# Altium PCB MB.PcbDoc (part 2 of 3)
Units mil, origin at the board's own origin, x right, y up, seen from the top; angles counter-clockwise.
Board outline 5718.69 x 3947.04 mil, 2 copper layers (Top Layer, Bottom Layer); 146 components, 154 nets, 660 pads, 249 vias.
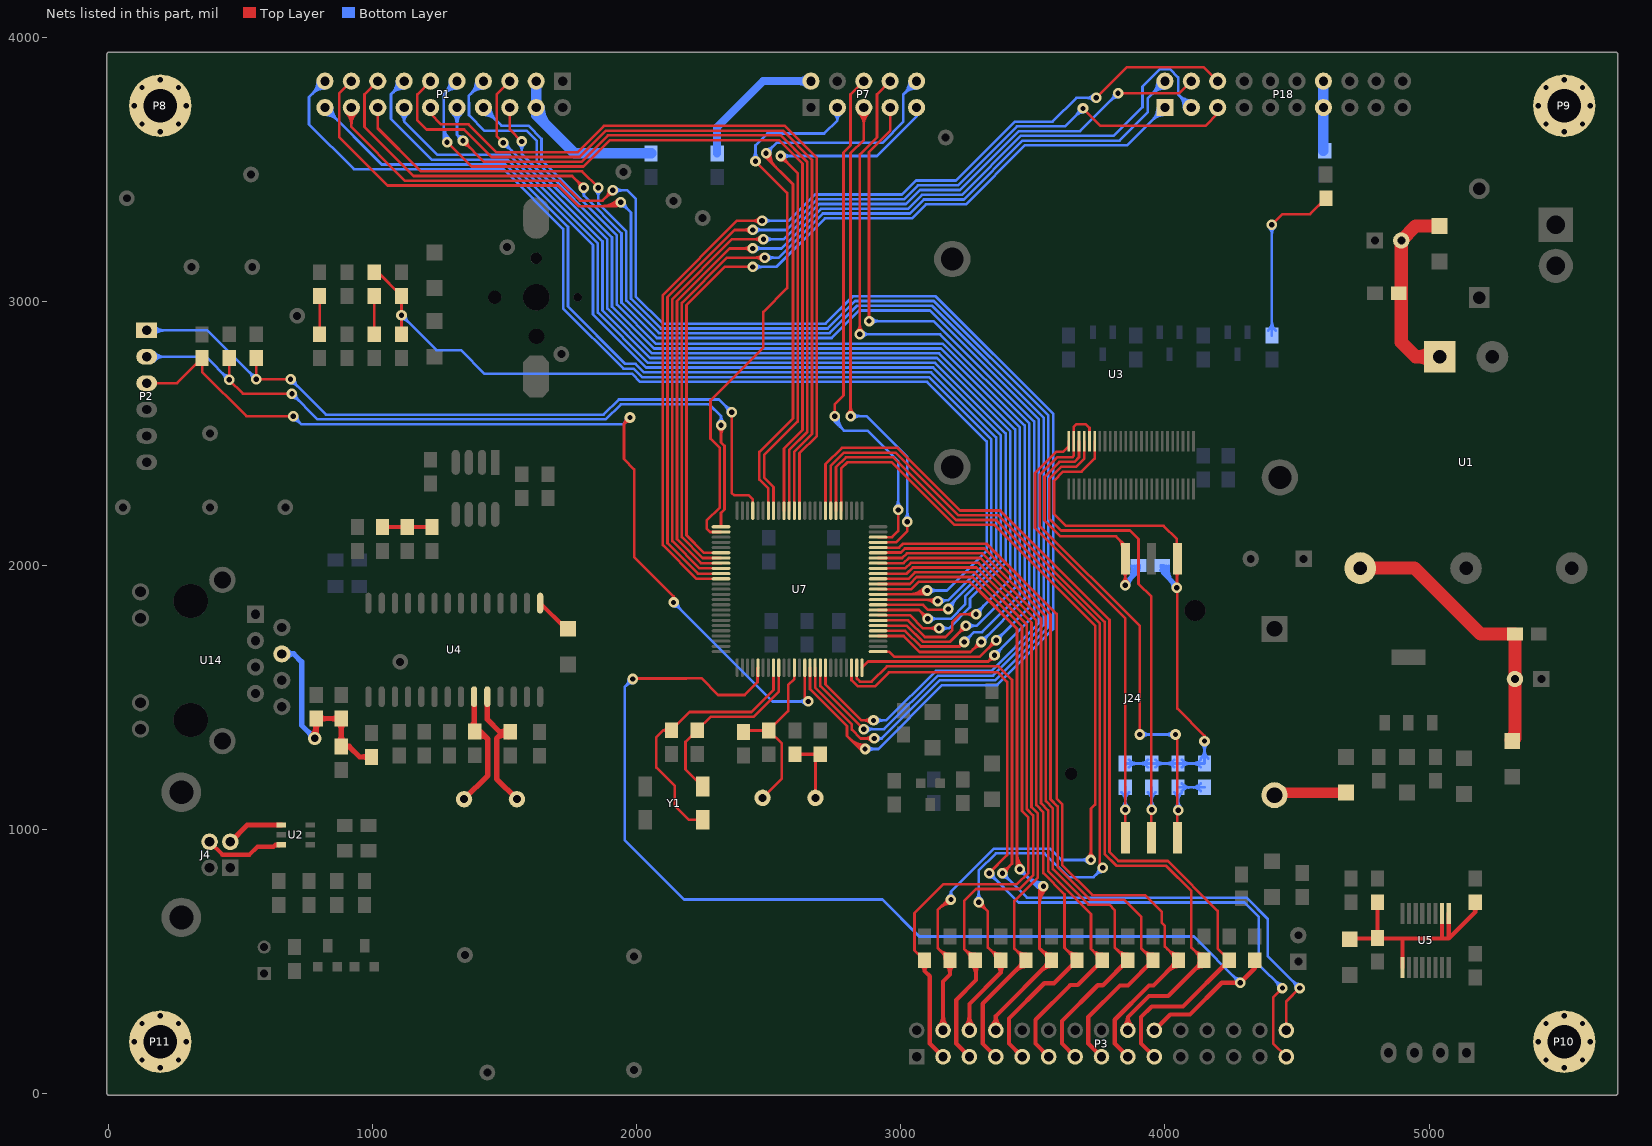
[diagram p2: the nets of this part, all layers, seen from the top]

## Via types
v1: diameter 40, hole 20, Top Layer to Bottom Layer, 190 vias
v2: diameter 50, hole 28, Top Layer to Bottom Layer, 49 vias
v3: diameter 40, hole 22, Top Layer to Bottom Layer, 5 vias
v4: diameter 50, hole 30, Top Layer to Bottom Layer, 4 vias
v5: diameter 80, hole 35, Top Layer to Bottom Layer, 1 vias

## Nets (pads, with @x,y where several pads share a name; then routed paths per layer and width w, separated by ;. In a path a pad name is that pad's centre, name@x,y a point inside that pad or via, vN(x,y) a via of type N, cw(c..) or ccw(c..) an arc to the next point about the centre after c; other vN are vias at no path point) (continued)
NetC1_2: C1.2 P2.3 U7.14 | length 3897.2
  Top Layer w10: P2.3@145,2690 260.17,2690 C1.2@355,2784.83 355,2732.53 522.53,2565 v1(700,2565) ; v1@1960.05,2558.82 cw(c1932.37,2556.63) 1952,2537 ; v1@1973.82,2545.05 ccw(c1971.63,2517.37) 1952,2537 ; v1(1975,2560) 1952,2537 ; v1@2133.86,1873.69 ccw(c2129.62,1883.16) 2140,1883.16 ; v1(2140,1860) 2140,1883.16 ; v1@2146.14,1873.69 cw(c2150.38,1883.16) 2140,1883.16 ; U7.14@2636.57,1612.8 2636.57,1498.43 v1(2650,1485) ; 1952,2537 1952,2403 1991,2364 1991,2032.16 2140,1883.16
  Bottom Layer w10: v1@700,2550 cw(c700,2513.79) 725.61,2539.39 cw(c751.21,2565) v1@715,2565 ; v1(700,2565) 730,2535 1950,2535 ; v1@1960,2559.74 cw(c1925.85,2559.16) 1950,2535 ; v1@1974.74,2545 ccw(c1974.16,2510.85) 1950,2535 ; v1(1975,2560) 1950,2535 ; v1@2140,1845 cw(c2140,1808.79) 2165.61,1834.39 cw(c2191.21,1860) v1@2155,1860 ; v1(2140,1860) 2515,1485 v1(2650,1485) ; v1@2639.39,1474.39 ccw(c2613.79,1448.79) 2613.79,1485 ccw(c2613.79,1521.21) v1@2639.39,1495.61
NetC3_1: C3.1 U7.8 Y1.4 | length 1049.5
  Top Layer w10: C3.1@2113.63,1367.88 ccw(c2101.04,1362.25) 2101.04,1376.04 ; C3.1@2113.63,1384.2 cw(c2101.04,1389.83) 2101.04,1376.04 ; Y1.4@2250.16,1037.05 2197.95,1037.05 2145,1090 2145,1165 2075,1235 2075,1350 2101.04,1376.04 ; U7.8@2518.46,1612.8 2518.46,1528.46 2435,1445 2200.85,1445 C3.1@2131.89,1376.04 2101.04,1376.04
NetC9_1: C9.1 U4.23 Y2.1 | length 600
  Top Layer w20: Y2.1@1346.89,1115.04 1436.89,1205.04 1436.89,1343.11 ; C9.1@1381.89,1370.04 1381.89,1400.04 C9.1@1386.89,1371.04 ; U4.23@1384.84,1502.91 1384.84,1373.09 C9.1@1386.89,1371.04 ; C9.1@1385.02,1370.67 cw(c1395.59,1344.53) 1415.53,1364.47 ; C9.1@1392.51,1352.13 cw(c1407.89,1314.11) 1436.89,1343.11 ; C9.1@1386.89,1371.04 1408.96,1371.04 1436.89,1343.11
NetC10_2: C10.2 L1.2 R14.1 R15.1 U14.4 | length 1351.1
  Top Layer w20: v2@771.28,1355.65 ccw(c733.61,1393.32) R14.1@786.89,1393.32 ; R14.1@776.28,1404.43 cw(c750.68,1378.83) 786.89,1378.83 cw(c823.1,1378.83) R14.1@797.5,1404.43 ; v2(781.89,1345.04) 786.89,1350.04 R14.1@786.89,1420.04 R15.1@881.89,1420.04 C10.2@881.89,1315.04 911.89,1315.04 ; R14.1@797.5,1409.43 cw(c823.1,1383.83) 823.1,1420.04 cw(c823.1,1456.25) R14.1@797.5,1430.65 ; C10.2@871.28,1330.65 ccw(c845.68,1356.25) 881.89,1356.25 ccw(c918.1,1356.25) C10.2@892.5,1330.65 ; R15.1@871.28,1404.43 cw(c845.68,1378.83) 881.89,1378.83 cw(c918.1,1378.83) R15.1@892.5,1404.43 ; R15.1@871.28,1409.43 ccw(c845.68,1383.83) 845.68,1420.04 ccw(c845.68,1456.25) R15.1@871.28,1430.65 ; C10.2@893.89,1306.04 cw(c911.89,1292.54) 911.89,1315.04 ; C10.2@893.89,1324.04 ccw(c911.89,1337.54) 911.89,1315.04 ; L1.2@986.28,1264.43 ccw(c960.68,1238.83) 960.68,1275.04 ccw(c960.68,1311.25) L1.2@986.28,1285.65 ; L1.2@996.89,1275.04 951.89,1275.04 911.89,1315.04
  Bottom Layer w20: U14.4@656.89,1665.04 701.89,1665.04 ; U14.4@674.89,1651.54 cw(c701.89,1631.29) 701.89,1665.04 ; U14.4@674.89,1678.54 ccw(c701.89,1698.79) 701.89,1665.04 ; v2@766.89,1345.04 ccw(c730.68,1345.04) 756.28,1370.65 ccw(c781.89,1396.25) v2@781.89,1360.04 ; v2(781.89,1345.04) 731.89,1395.04 731.89,1635.04 701.89,1665.04
NetC11_2: C11.2 R62.1 R63.1 | length 188
  Top Layer w16: R62.1@1037.89,2145.04 R63.1@1131.89,2145.04 C11.2@1225.89,2145.04
NetC12_1: C12.1 C13.1 C26.1 C28.1 C39.1 J24.4 U3.6 | length 3425.4
  Top Layer w10: U3.6@3733.99,2470.19 3733.99,2403.99 3685,2355 3615,2355 3580,2320 3580,2195 3625,2150 3995,2150 4045,2100 4045,2026.85 J24.4@4046.85,2025 ; J24.4@4038.37,1974.46 cw(c4022.35,1958.44) 4045,1958.44 ; v1(4045,1915) 4045,2023.15 J24.4@4046.85,2025 ; 4045,1949.51 cw(c4080.29,1949.51) J24.4@4055.34,1974.46 ; v1(4150,1335) 4150,1355 4046.85,1458.15 J24.4@4046.85,2025
  Bottom Layer w10: C26.1@3850,1245 3855,1250 C12.1@3950,1250 C39.1@4050,1250 C13.1@4150,1250 v1(4150,1335) ; C26.1@3864.14,1235.86 cw(c3898.28,1201.72) 3898.28,1250 cw(c3898.28,1298.28) C26.1@3864.14,1264.14 ; C12.1@3935.86,1235.86 ccw(c3901.72,1201.72) 3901.72,1250 ccw(c3901.72,1298.28) C12.1@3935.86,1264.14 ; C12.1@3964.14,1235.86 cw(c3998.28,1201.72) 3998.28,1250 cw(c3998.28,1298.28) C12.1@3964.14,1264.14 ; C28.1@3982.31,1981.54 cw(c3977.5,1970) 3990,1970 ; C28.1@3985.04,2000.91 ccw(c4035.76,1996.27) 3999.75,1960.25 ; C28.1@3990,2000 3990,1970 ; C28.1@3995,2000 ccw(c4063.39,1993.73) 4014.83,1945.17 ; C28.1@3997.69,1981.54 ccw(c4002.5,1970) 3990,1970 ; C28.1@4004.96,1999.09 ccw(c4091.03,1991.2) 4029.91,1930.09 ; C28.1@4014.92,1998.18 ccw(c4118.66,1988.67) v1(4045,1915) 3990,1970 ; 4015.69,1952.21 ccw(c4059.15,1980.16) v1@4048.18,1929.66 ; 4027.52,1933.81 cw(c4010.06,1922.59) v1@4030.34,1918.18 ; 4028.75,1931.9 ccw(c4051.91,1946.79) v1@4046.06,1919.89 ; v1@4030,1915 ccw(c3993.79,1915) 4019.39,1940.61 ccw(c4045,1966.21) v1@4045,1930 ; v1@4030.51,1918.88 ccw(c3995.54,1928.25) 4026.89,1946.36 ccw(c4058.26,1964.47) v1@4048.88,1929.49 ; C39.1@4035.86,1235.86 ccw(c4001.72,1201.72) 4001.72,1250 ccw(c4001.72,1298.28) C39.1@4035.86,1264.14 ; C39.1@4064.14,1235.86 cw(c4098.28,1201.72) 4098.28,1250 cw(c4098.28,1298.28) C39.1@4064.14,1264.14 ; C13.1@4135.86,1235.86 ccw(c4101.72,1201.72) 4101.72,1250 ccw(c4101.72,1298.28) C13.1@4135.86,1264.14 ; C13.1@4135.86,1269.14 ccw(c4101.72,1303.28) 4150,1303.28 ccw(c4198.28,1303.28) C13.1@4164.14,1269.14 ; v1@4139.39,1324.39 cw(c4113.79,1298.79) 4150,1298.79 cw(c4186.21,1298.79) v1@4160.61,1324.39
NetC12_2: C12.2 J24.2 U3.4 | length 2121.9
  Top Layer w10: U3.4@3694.62,2470.19 3694.62,2403.7 3664.91,2374 3608.37,2374 3562,2327.63 3562,2177.54 3607.54,2132 3868,2132 3900,2100 3900,1930 3948.43,1881.57 v1@3948.43,1073.43 ; J24.2@3948.43,968.94 v1@3948.43,1073.43 ; v1(3950,1075) v1@3948.43,1073.43
  Bottom Layer w10: C12.2@3935.86,1140.86 cw(c3901.72,1106.72) 3950,1106.72 cw(c3998.28,1106.72) C12.2@3964.14,1140.86 ; v1@3939.39,1085.61 ccw(c3913.79,1111.21) 3950,1111.21 ccw(c3986.21,1111.21) v1@3960.61,1085.61 ; v1(3950,1075) C12.2@3950,1160
NetC13_2: C13.2 C39.2 J24.1 U3.2 U3.5 | length 2612.8
  Top Layer w10: U3.5@3714.3,2470.19 3714.3,2520.7 3700,2535 3665,2535 3655.25,2525.25 U3.2@3655.25,2470.19 3655.25,2415.25 3650,2410 3593.46,2410 3526,2342.54 3526,2149 3905,1770 v1(3905,1360) ; v1(4040,1360) 4046.85,1353.15 J24.1@4046.85,968.94
  Bottom Layer w10: v1(3905,1360) v1(4040,1360) ; v1@3915.61,1349.39 cw(c3941.21,1323.79) 3941.21,1360 cw(c3941.21,1396.21) v1@3915.61,1370.61 ; v1@4029.39,1349.39 ccw(c4003.79,1323.79) 4003.79,1360 ccw(c4003.79,1396.21) v1@4029.39,1370.61 ; C39.2@4035.86,1140.86 cw(c4001.72,1106.72) 4050,1106.72 cw(c4098.28,1106.72) C39.2@4064.14,1140.86 ; v1@4039.39,1083.76 ccw(c4013.79,1109.36) 4050,1109.36 ccw(c4086.21,1109.36) v1@4060.61,1083.76 ; v1(4050,1073.15) C39.2@4050,1130.47 ; C39.2@4050,1160 C13.2@4150,1160 ; C39.2@4064.14,1145.86 cw(c4098.28,1111.72) 4098.28,1160 cw(c4098.28,1208.28) C39.2@4064.14,1174.14 ; C13.2@4135.86,1145.86 ccw(c4101.72,1111.72) 4101.72,1160 ccw(c4101.72,1208.28) C13.2@4135.86,1174.14
NetC14_1: C14.1 U4.24 Y2.2 | length 710.4
  Top Layer w20: U4.24@1434.84,1502.91 1434.84,1417.09 1481.89,1370.04 1495.04,1370.04 ; 1489.17,1364.17 cw(c1510.28,1343.06) C14.1@1524.22,1369.46 ; C14.1@1506.89,1380.04 C14.1@1506.89,1370.04 ; C14.1@1511.28,1359.43 ccw(c1485.68,1333.83) 1485.68,1370.04 ccw(c1485.68,1406.25) C14.1@1511.28,1380.65 ; C14.1@1514.89,1351.77 ccw(c1497.03,1317.97) 1470,1345 ; C14.1@1521.89,1370.04 C14.1@1506.89,1370.04 ; Y2.2@1546.89,1115.04 1470,1191.93 1470,1345 ; 1470,1345 1495.04,1370.04 ; 1495.04,1370.04 cw(c1495.04,1353.51) 1509.12,1362.18 ccw(c1495.04,1353.51) 1495.04,1370.04 ; 1495.04,1370.04 ccw(c1495.04,1386.57) 1509.12,1377.9 cw(c1495.04,1386.57) 1495.04,1370.04 ; 1495.04,1370.04 C14.1@1506.89,1370.04
NetC15_2: C15.2 U4.1 | length 145.4
  Top Layer w16: U4.1@1634.84,1857.24 1732.09,1760 C15.2@1740,1760
NetC22_2: C22.2 C23.2 R21.2 R24.1 U5.1 U5.9 U5.10 | length 1034.7
  Top Layer w16: C22.2@4700,585 4702.54,587.54 C23.2@4807.46,587.54 ; R24.1@4805,725 C23.2@4805,590 C23.2@4807.46,587.54 ; U5.1@4899.39,477.68 4899.39,586.93 4900,587.54 ; U5.10@5049.39,682.4 5049.39,587.54 ; U5.9@5074.39,682.4 5074.39,587.54 ; R21.2@5165.54,705.88 cw(c5153.67,688.15) 5175,688.15 ; R21.2@5175,725 5175,688.15 ; R21.2@5184.46,705.88 ccw(c5196.33,688.15) 5175,688.15 ; C23.2@4807.46,587.54 4900,587.54 ; 4900,587.54 5049.39,587.54 ; 5049.39,587.54 5074.39,587.54 ; 5074.39,587.54 5175,688.15
NetC26_2: C26.2 J24.3 U3.1 | length 1929.3
  Top Layer w10: U3.1@3635.56,2470.19 3635.56,2450.56 3615,2430 3588,2430 3508,2350 3508,2141.54 3850,1799.54 v1(3850,1075) J24.3@3850,968.94
  Bottom Layer w10: C26.2@3835.86,1140.86 cw(c3801.72,1106.72) 3850,1106.72 cw(c3898.28,1106.72) C26.2@3864.14,1140.86 ; v1@3839.39,1085.61 ccw(c3813.79,1111.21) 3850,1111.21 ccw(c3886.21,1111.21) v1@3860.61,1085.61 ; v1(3850,1075) C26.2@3850,1160
NetC27_1: C27.1 U7.9 Y1.1 | length 794.9
  Top Layer w10: U7.9@2538.15,1612.8 2538.15,1522.69 2442.46,1427 2280.18,1427 C27.1@2229.22,1376.04 2185,1331.82 2185,1228.19 Y1.1@2250.16,1163.03 ; Y1.1@2250.16,1163.03 Y1.1@2250.16,1170 ; Y1.1@2250.16,1163.03 2261.89,1187.74 Y1.1@2260,1185.85 ; Y1.1@2250.16,1170 2250.16,1176.01 Y1.1@2260,1185.85 ; Y1.1@2250.16,1170 2260,1179.84 Y1.1@2260,1185.85
NetC28_2: C28.2 J24.6 U3.3 | length 1577.3
  Top Layer w10: U3.3@3674.93,2470.19 3674.93,2409.48 3657.46,2392 3600.91,2392 3544,2335.09 3544,2170.09 3604.09,2110 3815,2110 3850,2075 J24.6@3850,2025 v1(3850,1925) ; 3823.9,2101.1 cw(c3789.85,2067.06) J24.6@3838,2067.06 ; v1@3839.39,1935.61 ccw(c3813.79,1961.21) 3850,1961.21 ccw(c3886.21,1961.21) v1@3860.61,1935.61 ; J24.6@3840.97,2084.03 cw(c3823.99,2067.06) J24.6@3848,2067.06 ; J24.6@3841.51,1974.46 cw(c3821.03,1953.97) 3850,1953.97 cw(c3878.97,1953.97) J24.6@3858.49,1974.46
  Bottom Layer w10: v1@3848.71,1929.83 ccw(c3840.87,1959.07) 3867.08,1943.93 ; v1@3850,1910 v1(3850,1925) ; v1@3850,1940 ccw(c3850,1976.21) 3875.61,1950.61 ccw(c3901.21,1925) v1@3865,1925 ; 3864.56,1939.56 ccw(c3813.82,1990.3) C28.2@3885.07,1998.81 ; 3866.29,1942.55 ccw(c3881.89,1933.55) 3864.49,1928.88 cw(c3899.46,1938.25) 3868.11,1956.36 cw(c3836.74,1974.47) 3846.12,1939.49 ccw(c3832.04,1992.04) 3879.16,1964.84 ; C28.2@3875.14,1997.63 cw(c3787.81,1987.19) v1(3850,1925) ; 3879.12,1954.12 ccw(c3839.83,1993.41) C28.2@3895,2000 ; 3893.68,1968.68 ccw(c3865.84,1996.52) C28.2@3904.93,2001.19 ; C28.2@3900,2000 3900,1975 v1(3850,1925)
NetC30_1: C30.1 R1.1 U7.12 Y4.2 | length 708.3
  Top Layer w10: R1.1@2405,1370 2410,1375 C30.1@2500,1375 ; Y4.2@2476.89,1120.04 2550,1193.15 2550,1325 C30.1@2500,1375 ; U7.12@2597.2,1612.8 2597.2,1570.77 2574,1547.57 2574,1449 C30.1@2500,1375
  Top Layer w12: R1.1@2405,1370 2421.89,1381.04 R1.1@2426.89,1376.04
NetC31_1: C31.1 R29.2 Y4.1 | length 267.5
  Top Layer w12: R29.2@2600,1285 C31.1@2695,1285 2676.89,1266.89 Y4.1@2676.89,1120.04
NetC42_1: C42.1 C43.1 L8.1 U1.1 | length 853.3
  Top Layer w50: U1.1@5015.25,2765.25 ccw(c4955.5,2705.5) 4955.5,2790 ccw(c4955.5,2874.5) U1.1@5015.25,2814.75 ; U1.1@5040,2790 4950,2790 4895,2845 C42.1@4895,3230 4950,3285 L8.1@5040,3285
NetC44_1: C44.1 C45.1 L3.2 U1.5 | length 1119
  Top Layer w50: U1.5@4740,1990 4945,1990 5195,1740 C45.1@5325,1740 C44.1@5325,1585 ; L3.2@5311.46,1338.54 ccw(c5278.79,1371.21) 5325,1371.21 ; L3.2@5315,1335 5325,1345 C44.1@5325,1570
NetD1_1: D1.1 L6.2 | length 274.1
  Top Layer w40: D1.1@4415,1130.08 4430.08,1130.08 4440,1140 L6.2@4685,1140
NetD2_2: D2.2 R57.2 | length 799.1
  Top Layer w10: v1(4405,3290) 4445,3330 4550,3330 D2.2@4610,3390
  Bottom Layer w10: R57.2@4390.86,2889.14 ccw(c4356.72,2923.28) 4405,2923.28 ccw(c4453.28,2923.28) R57.2@4419.14,2889.14 ; v1@4394.39,3279.39 cw(c4368.79,3253.79) 4405,3253.79 cw(c4441.21,3253.79) v1@4415.61,3279.39 ; R57.2@4405,2870 v1(4405,3290)
NetD3_2: D3.2 R20.1 | length 145
  Top Layer w10: R20.1@800,2875 D3.2@800,3020
NetD6_1: D6.1 R8.2 R10.1 U7.37 | length 3869.5
  Top Layer w10: D6.1@1006.67,3110 1020,3110 R8.2@1110,3020 v1(1110,2947.5) R10.1@1110,2875 ; U7.37@2914.13,1890.35 3085.35,1890.35 ; 3028.43,1890.35 ccw(c3028.43,1976.57) v1@3089.39,1915.61 ; 3052.57,1890.35 ccw(c3052.57,1952.43) v1@3096.46,1908.54 ; 3076.71,1890.35 ccw(c3076.71,1928.29) v1@3103.54,1901.46 ; v1@3086.61,1898.23 cw(c3080.55,1895.16) 3085.35,1890.35 ; v1@3093.23,1891.61 ccw(c3090.16,1885.55) 3085.35,1890.35 ; v1(3100,1905) 3085.35,1890.35
  Bottom Layer w10: v1@1110,2932.5 cw(c1110,2896.29) 1135.61,2921.89 cw(c1161.21,2947.5) v1@1125,2947.5 ; v1(1110,2947.5) 1242.5,2815 1335,2815 1425,2725 1983.53,2725 2013.53,2695 3100,2695 3325,2470 3325,2055 3175,1905 v1(3100,1905) ; v1@3110.61,1894.39 cw(c3136.21,1868.79) 3136.21,1905 cw(c3136.21,1941.21) v1@3110.61,1915.61
NetD6_2: D6.2 R22.1 | length 145
  Top Layer w10: R22.1@1006.67,2875 D6.2@1006.67,3020
NetJ4_2: J4.2 U2.1 | length 219.4
  Top Layer w20: J4.2@461.89,953.47 525.83,1017.4 U2.1@654.76,1017.4
NetJ4_3: J4.3 U2.3 | length 343.3
  Top Layer w16: J4.3@383.15,953.47 431.62,905 535,905 565,935 625,935 ; U2.3@646.42,940.82 ccw(c640.79,919.21) 625,935 ; U2.3@654.76,942.6 632.6,942.6 625,935
  Top Layer w20: J4.3@383.15,953.47 J4.3@383.15,966.3
NetL10_2: L10.2 P1.3 P1.4 | length 700.3
  Bottom Layer w40: P1.3@1620,3833.15 P1.4@1620,3733.15 1620,3705 1765,3560 L10.2@2055,3560 ; P1.4@1632.5,3733.15 ccw(c1730.64,3733.15) 1661.24,3663.76
NetL11_2: L11.2 P18.13 P18.14 | length 263.1
  Bottom Layer w40: L11.2@4600,3570 P18.13@4600,3733.15 P18.14@4600,3833.15
NetL12_2: L12.2 P7.2 | length 593.1
  Bottom Layer w30: L12.2@2305,3560 2305,3660 2478.15,3833.15 P7.2@2660,3833.15 ; P7.2@2647.63,3820.78 ccw(c2617.75,3790.9) 2617.75,3833.15 ccw(c2617.75,3875.4) P7.2@2647.63,3845.52
NetP1_5: P1.5 U7.32 | length 4157.3
  Top Layer w10: v1(1495,3600) 1470,3625 1470,3783.15 P1.5@1520,3833.15 ; U7.32@2914.13,1791.93 3028.07,1791.93 3091,1729 3169,1729 3195,1755 3195,1785 3225,1815 v1(3285,1815) ; v1@3274.39,1804.39 ccw(c3248.79,1778.79) 3248.79,1815 ccw(c3248.79,1851.21) v1@3274.39,1825.61
  Bottom Layer w10: v1@1495,3585 cw(c1495,3541.54) 1525.73,3572.27 ; v1(1495,3600) 1498,3600 1871,3227 1871,2964.81 2050.81,2785 3137.28,2785 3415,2507.28 3415,1948.33 3285,1818.33 v1(3285,1815) ; v1@1510,3600 ccw(c1538.97,3600) 1518.49,3579.51 ; v1@3285,1830 ccw(c3285,1858.17) 3304.92,1838.25 ; v1@3300,1815 cw(c3344.25,1815) 3312.96,1846.29
NetP1_6: P1.6 U7.31 | length 4045.6
  Top Layer w10: P1.6@1520,3733.15 1520,3650 v1(1565,3605) ; U7.31@2914.13,1772.24 3022.3,1772.24 3083.54,1711 3186,1711 v1(3246.67,1771.67) ; v1@3231.67,1771.67 cw(c3195.45,1771.67) 3221.06,1746.06 cw(c3246.67,1720.45) v1@3246.67,1756.67
  Bottom Layer w10: v1@1554.39,3594.39 cw(c1528.79,3568.79) 1565,3568.79 cw(c1601.21,3568.79) v1@1575.61,3594.39 ; v1(1565,3605) 1565,3558.46 1889,3234.46 1889,2972.27 2058.27,2803 3144.73,2803 3433,2514.73 3433,1916.33 3288.33,1771.67 v1(3246.67,1771.67) ; v1@3257.27,1761.06 cw(c3282.88,1735.45) 3282.88,1771.67 cw(c3282.88,1807.88) v1@3257.27,1782.27
NetP1_7: P1.7 U7.30 | length 4456.5
  Top Layer w10: U7.30@2914.13,1752.56 3016.53,1752.56 3076.09,1693 3223,1693 ; v1@3225.81,1705.14 cw(c3214.68,1701.32) 3223,1693 ; v1@3235.14,1695.81 ccw(c3231.32,1684.68) 3223,1693 ; v1(3240,1710) 3223,1693
  Bottom Layer w10: P1.7@1392.5,3833.15 cw(c1326.11,3833.15) 1373.05,3786.2 cw(c1420,3739.26) P1.7@1420,3805.65 ; P1.7@1402.5,3833.15 cw(c1360.25,3833.15) 1390.13,3803.28 cw(c1420,3773.4) P1.7@1420,3815.65 ; P1.7@1420,3833.15 1365,3778.15 1365,3753 1365.5,3752.5 1365.5,3704.5 1425,3645 1584.54,3645 1622,3607.54 1622,3526.91 1907,3241.91 1907,2979.72 2065.72,2821 3152.19,2821 3451,2522.19 3451,1890.54 3307.46,1747 3277,1747 v1(3240,1710) ; v1@3240,1725 ccw(c3240,1761.21) 3265.61,1735.61 ccw(c3291.21,1710) v1@3255,1710
NetP1_8: P1.8 U7.29 | length 4352.1
  Top Layer w10: U7.29@2914.13,1732.87 3010.76,1732.87 3071.63,1672 3263.67,1672 3301.67,1710 v1(3305,1710) ; 3273.71,1682.04 cw(c3305,1650.75) v1@3305,1695 ; 3281.75,1690.08 ccw(c3261.83,1710) v1@3290,1710
  Bottom Layer w10: P1.8@1420,3705.65 cw(c1420,3639.26) 1466.95,3686.2 cw(c1513.89,3733.15) P1.8@1447.5,3733.15 ; P1.8@1420,3715.65 cw(c1420,3673.4) 1449.87,3703.28 cw(c1479.75,3733.15) P1.8@1437.5,3733.15 ; P1.8@1420,3733.15 1488.15,3665 1590,3665 1640,3615 1640,3534.37 1925,3249.37 1925,2987.18 2073.18,2839 3159.65,2839 3469,2529.65 3469,1874 v1(3305,1710) ; v1@3305,1725 ccw(c3305,1761.21) 3330.61,1735.61 ccw(c3356.21,1710) v1@3320,1710
NetP1_9: P1.9 U7.66 | length 3360.9
  Top Layer w10: v1(1282.5,3602.5) 1375,3510 1799,3510 1899,3610 2538.63,3610 2628,3520.63 2628,2512.54 2557.83,2442.38 U7.66@2557.83,2207.28
  Bottom Layer w10: 1270,3620.61 ccw(c1300.61,3620.61) v1@1278.96,3598.96 ; 1270,3644.75 ccw(c1324.75,3644.75) v1@1286.04,3606.04 ; 1270,3668.89 ccw(c1348.89,3668.89) v1@1293.11,3613.11 ; v1(1282.5,3602.5) 1270,3615 1270,3783.15 P1.9@1320,3833.15 ; P1.9@1292.5,3833.15 cw(c1226.11,3833.15) 1273.05,3786.2 cw(c1320,3739.26) P1.9@1320,3805.65 ; P1.9@1302.5,3833.15 cw(c1260.25,3833.15) 1290.13,3803.28 cw(c1320,3773.4) P1.9@1320,3815.65
NetP1_10: P1.10 U7.65 | length 3177.9
  Top Layer w10: v1@1342.84,3592.84 cw(c1342.84,3556.63) 1368.45,3582.23 cw(c1394.05,3607.84) v1@1357.84,3607.84 ; v1(1342.84,3607.84) 1422.68,3528 1791.54,3528 1891.54,3628 2546.09,3628 2646,3528.09 2646,2505.09 2577.52,2436.61 U7.65@2577.52,2207.28
  Bottom Layer w10: P1.10@1300.55,3713.7 cw(c1253.61,3666.76) 1320,3666.76 cw(c1386.39,3666.76) P1.10@1339.45,3713.7 ; P1.10@1307.63,3720.78 cw(c1277.75,3690.9) 1320,3690.9 cw(c1362.25,3690.9) P1.10@1332.37,3720.78 ; P1.10@1320,3733.15 1320,3630.68 ; v1@1327.89,3609.1 ccw(c1300.72,3611.39) 1320,3630.68 ; v1@1341.58,3622.79 cw(c1339.28,3649.96) 1320,3630.68 ; v1(1342.84,3607.84) 1320,3630.68
NetP1_11: P1.11 U7.64 | length 3163.5
  Top Layer w10: P1.11@1220,3833.15 1170,3783.15 1170,3685 1205,3650 1347.35,3650 1451.35,3546 1784.09,3546 1884.09,3646 2553.54,3646 2664,3535.54 2664,2497.63 2597.2,2430.84 U7.64@2597.2,2207.28
NetP1_12: P1.12 U7.63 | length 2999.9
  Top Layer w10: P1.12@1220,3733.15 1220,3710 1260,3670 1363.33,3670 1469.33,3564 1776.63,3564 1876.63,3664 2561,3664 2682,3543 2682,2490.18 2616.89,2425.07 U7.63@2616.89,2207.28
NetP1_13: P1.13 U7.34 | length 4469.1
  Top Layer w10: U7.34@2914.13,1831.3 3068.7,1831.3 v1(3102,1798) ; v1@3087,1798 ccw(c3050.79,1798) 3076.39,1823.61 ccw(c3102,1849.21) v1@3102,1813
  Bottom Layer w10: P1.13@1092.5,3833.15 cw(c1026.11,3833.15) 1073.05,3786.2 cw(c1120,3739.26) P1.13@1120,3805.65 ; P1.13@1102.5,3833.15 cw(c1060.25,3833.15) 1090.13,3803.28 cw(c1120,3773.4) P1.13@1120,3815.65 ; P1.13@1120,3833.15 1070,3783.15 1070,3690 1224,3536 1511.09,3536 1835,3212.09 1835,2949.9 2035.9,2749 3122.37,2749 3379,2492.37 3379,2017.46 3244,1882.46 3244,1852.33 3189.67,1798 v1(3102,1798) ; v1@3112.61,1787.39 cw(c3138.21,1761.79) 3138.21,1798 cw(c3138.21,1834.21) v1@3112.61,1808.61
NetP1_14: P1.14 U7.33 | length 4319.2
  Top Layer w10: U7.33@2914.13,1811.61 3035,1811.61 3084.61,1762 v1(3145,1762) ; v1@3134.39,1751.39 ccw(c3108.79,1725.79) 3108.79,1762 ccw(c3108.79,1798.21) v1@3134.39,1772.61
  Bottom Layer w10: P1.14@1104.12,3710.7 cw(c1082.39,3680) 1120,3680 ; P1.14@1109.89,3718.86 cw(c1096.07,3699.33) 1120,3699.33 cw(c1143.93,3699.33) P1.14@1130.11,3718.86 ; P1.14@1120,3733.15 1120,3680 ; P1.14@1135.88,3710.7 ccw(c1157.61,3680) 1120,3680 ; v1(3145,1762) 3182,1762 3262,1842 3262,1875 3397,2010 3397,2499.82 3129.82,2767 2043.35,2767 1853,2957.35 1853,3219.54 1518.54,3554 1246,3554 1120,3680 ; v1@3155.61,1751.39 cw(c3181.21,1725.79) 3181.21,1762 cw(c3181.21,1798.21) v1@3155.61,1772.61
NetP1_15: P1.15 U7.18 | length 5527
  Top Layer w10: P1.15@1020,3833.15 970,3783.15 970,3660 1156,3474 1756,3474 v1(1800,3430) ; v1@1785,3430 ccw(c1748.79,3430) 1774.39,3455.61 ccw(c1800,3481.21) v1@1800,3445 ; U7.18@2715.31,1612.8 2715.31,1548.91 2851.05,1413.18 v1(2896.82,1413.18) ; v1@2886.22,1402.57 ccw(c2860.61,1376.96) 2860.61,1413.18 ccw(c2860.61,1449.39) v1@2886.22,1423.78
  Bottom Layer w10: v1@1790.94,3418.04 cw(c1777.15,3399.82) 1800,3399.82 ; v1(1800,3430) 1800,3399.82 ; v1@1809.06,3418.04 ccw(c1822.85,3399.82) 1800,3399.82 ; v1(2896.82,1413.18) 2944.85,1413.18 3132.63,1600.96 3342.63,1600.96 3523,1781.33 3523,2552.01 3110.01,2965 2842.37,2965 2738.37,2861 2076.63,2861 1943,2994.63 1943,3256.82 1800,3399.82 ; v1@2907.43,1402.57 cw(c2933.04,1376.96) 2933.04,1413.18 cw(c2933.04,1449.39) v1@2907.43,1423.78
NetP1_16: P1.16 U7.17 | length 5372.8
  Top Layer w10: P1.16@1020,3733.15 1020,3655 1183,3492 1793,3492 v1(1855,3430) ; U7.17@2695.63,1612.8 2695.63,1543.14 2858.77,1380 v1(2860,1380)
  Bottom Layer w10: v1@1844.39,3419.39 cw(c1818.79,3393.79) 1855,3393.79 cw(c1891.21,3393.79) v1@1865.61,3419.39 ; v1(1855,3430) 1855,3370.28 1961,3264.28 1961,3002.09 2084.09,2879 2730.91,2879 2834.91,2983 3117.47,2983 3541,2559.47 3541,1773.88 3350.09,1582.96 3140.09,1582.96 2937.12,1380 v1(2860,1380) ; v1@2870.61,1369.39 cw(c2896.21,1343.79) 2896.21,1380 cw(c2896.21,1416.21) v1@2870.61,1390.61
NetP1_17: P1.17 U7.16 | length 5984.1
  Top Layer w10: P1.17@920,3833.15 874.5,3787.65 874.5,3620.5 1057,3438 1702.54,3438 1780.54,3360 1925,3360 ; 1867.57,3360 ccw(c1867.57,3447.43) v1@1929.39,3385.61 ; 1891.72,3360 ccw(c1891.72,3423.28) v1@1936.46,3378.54 ; 1915.86,3360 ccw(c1915.86,3399.14) v1@1943.54,3371.46 ; v1@1926.46,3368.53 cw(c1919.7,3365.3) 1925,3360 ; v1@1933.53,3361.46 ccw(c1930.3,3354.7) 1925,3360 ; v1(1940,3375) 1925,3360 ; U7.16@2675.94,1612.8 2675.94,1537.37 2814.67,1398.65 2814.67,1378.66 2848.33,1345 v1(2900,1345) ; v1@2889.39,1334.39 ccw(c2863.79,1308.79) 2863.79,1345 ccw(c2863.79,1381.21) v1@2889.39,1355.61
  Bottom Layer w10: v1@1940,3360 cw(c1940,3323.79) 1965.61,3349.39 cw(c1991.21,3375) v1@1955,3375 ; v1(1940,3375) 1979,3336 1979,3009.54 2091.54,2897 2723.46,2897 2827.46,3001 3124.93,3001 3559,2566.93 3559,1766.42 3357.54,1564.96 3147.54,1564.96 2927.58,1345 ; v1(2900,1345) 2927.58,1345 ; v1@2912.59,1336.85 cw(c2927.58,1327.15) 2927.58,1345 ; v1@2912.59,1353.15 ccw(c2927.58,1362.85) 2927.58,1345
NetP1_18: P1.18 U7.15 | length 6110.1
  Top Layer w10: P1.18@900.55,3713.7 cw(c853.61,3666.76) 920,3666.76 cw(c986.39,3666.76) P1.18@939.45,3713.7 ; P1.18@907.63,3720.78 cw(c877.75,3690.9) 920,3690.9 cw(c962.25,3690.9) P1.18@932.37,3720.78 ; P1.18@920,3733.15 920,3660 1124,3456 1710,3456 1785,3381 1871,3381 v1(1910,3420) ; v1@1895,3420 cw(c1858.79,3420) 1884.39,3394.39 cw(c1910,3368.79) v1@1910,3405 ; U7.15@2656.26,1612.8 2656.26,1531.6 2796.67,1391.19 2796.67,1355 2846.67,1305 v1(2865,1305) ; 2808.1,1343.57 ccw(c2865,1400.47) v1@2865,1320 ; 2825.17,1326.5 ccw(c2865,1366.33) v1@2865,1310 ; 2842.24,1309.43 ccw(c2865,1332.18) v1@2865,1300
  Bottom Layer w10: v1(1910,3420) 1965,3420 1997,3388 1997,3017 2099,2915 2716,2915 2820,3019 3132.38,3019 3577,2574.38 3577,1758.96 3365,1546.96 3156.96,1546.96 2915,1305 v1(2865,1305) ; v1@1920.61,3409.39 cw(c1946.21,3383.79) 1946.21,3420 cw(c1946.21,3456.21) v1@1920.61,3430.61 ; v1@2875.61,1294.39 cw(c2901.21,1268.79) 2901.21,1305 cw(c2901.21,1341.21) v1@2875.61,1315.61
NetP1_19: P1.19 U7.36 | length 4690.8
  Top Layer w10: U7.36@2914.13,1870.67 3134.33,1870.67 v1(3140,1865) ; 3090.1,1870.67 cw(c3090.1,1815.1) v1@3129.39,1854.39 ; 3114.24,1870.67 cw(c3114.24,1839.24) v1@3136.46,1861.46 ; 3117.47,1870.67 ccw(c3117.47,1887.53) v1@3129.39,1875.61
  Bottom Layer w10: P1.19@792.5,3833.15 cw(c726.11,3833.15) 773.05,3786.2 cw(c820,3739.26) P1.19@820,3805.65 ; P1.19@802.5,3833.15 cw(c760.25,3833.15) 790.13,3803.28 cw(c820,3773.4) P1.19@820,3815.65 ; P1.19@820,3833.15 760,3773.15 760,3670 930,3500 1496.18,3500 1722,3274.18 1722,2972.54 1949.54,2745 1988.99,2745 2020.99,2713 3107.46,2713 3343,2477.46 3343,2032.37 3178.63,1868 ; v1(3140,1865) 3143,1868 3178.63,1868 ; v1@3150.61,1875.61 ccw(c3168.97,1893.97) 3168.97,1868 ; v1@3151.48,1855.35 cw(c3178.63,1832.55) 3178.63,1868
NetP1_20: P1.20 U7.35 | length 4488.5
  Top Layer w10: U7.35@2914.13,1850.98 3084.47,1850.98 3103.46,1832 3177,1832 v1(3180,1835)
  Bottom Layer w10: P1.20@820,3705.65 cw(c820,3639.26) 866.95,3686.2 cw(c913.89,3733.15) P1.20@847.5,3733.15 ; P1.20@820,3715.65 cw(c820,3673.4) 849.87,3703.28 cw(c879.75,3733.15) P1.20@837.5,3733.15 ; P1.20@820,3733.15 1035.15,3518 1503.63,3518 1740,3281.63 1740,2980 1957,2763 1996.44,2763 2028.44,2731 3114.91,2731 3361,2484.91 3361,2024.91 3180,1843.91 v1(3180,1835) ; v1@3180,1850 ccw(c3180,1864.7) 3190.39,1854.31 ; v1@3185,1835 cw(c3218.59,1835) 3194.84,1858.75 ; v1@3195,1835 cw(c3252.73,1835) 3211.91,1875.82
NetP2_1: P2.1 R40.1 U7.72 | length 3227.3
  Top Layer w10: R40.1@560,2785 v1(560,2705) v1(690,2705) ; v1(2360,2580) 2360,2275 2370,2265 2425,2265 2439.72,2250.28 U7.72@2439.72,2207.28
  Bottom Layer w10: P2.1@145,2890 375,2890 v1(560,2705) ; P2.1@165.12,2879.73 cw(c189.92,2854.93) 189.92,2890 cw(c189.92,2925.07) P2.1@165.12,2900.27 ; P2.1@172.19,2872.66 cw(c214.06,2830.79) 214.06,2890 cw(c214.06,2949.21) P2.1@172.19,2907.34 ; v1@545,2705 ccw(c508.79,2705) 534.39,2730.61 ccw(c560,2756.21) v1@560,2720 ; v1@690,2690 cw(c690,2653.79) 715.61,2679.39 cw(c741.21,2705) v1@705,2705 ; v1(690,2705) 824,2571 1875.54,2571 1932.54,2628 2312,2628 v1(2360,2580) ; v1@2345,2580 ccw(c2308.79,2580) 2334.39,2605.61 ccw(c2360,2631.21) v1@2360,2595
NetP2_2: P2.2 R41.1 U7.76 | length 3200.3
  Top Layer w10: R41.1@457.5,2785 v1(457.5,2702.5) 510,2650 v1(695,2650) ; v1@2309.04,2519.75 cw(c2283.43,2494.14) 2319.65,2494.14 cw(c2355.86,2494.14) v1@2330.25,2519.75 ; U7.76@2319.65,2146.26 2319.65,2199.19 2333,2212.54 2333,2452.46 2319.65,2465.81 v1(2319.65,2530.35)
  Bottom Layer w10: P2.2@145,2790 370,2790 v1(457.5,2702.5) ; P2.2@165.11,2779.73 cw(c189.92,2754.93) 189.92,2790 cw(c189.92,2825.07) P2.2@165.11,2800.27 ; P2.2@172.19,2772.66 cw(c214.06,2730.79) 214.06,2790 cw(c214.06,2849.21) P2.2@172.19,2807.34 ; v1@442.5,2702.5 ccw(c406.29,2702.5) 431.89,2728.11 ccw(c457.5,2753.71) v1@457.5,2717.5 ; v1@695,2635 cw(c695,2598.79) 720.61,2624.39 cw(c746.21,2650) v1@710,2650 ; v1(695,2650) 792,2553 1883,2553 1940,2610 2275,2610 2319.65,2565.35 ; v1@2309.3,2541.22 ccw(c2286.32,2565.35) 2319.65,2565.35 ; v1(2319.65,2530.35) 2319.65,2565.35 ; v1@2329.99,2541.22 cw(c2352.98,2565.35) 2319.65,2565.35
NetP3_3: P3.3 R60.2 U7.39 | length 2708.1
  Top Layer w10: U7.39@2914.13,1929.72 3034.23,1929.72 3060.5,1956 3271.71,1956 3459,1768.71 3459,1070 3483,1046 3483,836.33 3439.67,793 3161.33,793 3052,683.67 3052,543 R60.2@3090,505
  Top Layer w16: R60.2@3079.49,486.64 cw(c3062.47,465) 3090,465 ; R60.2@3090,505 3090,465 ; R60.2@3100.51,486.64 ccw(c3117.53,465) 3090,465 ; P3.3@3160,140 3110,190 3110,445 3090,465
NetP3_4: P3.4 R19.2 U7.55 | length 3970
  Top Layer w10: U7.55@2774.37,2207.28 2774.37,2366.04 2799.33,2391 2965.37,2391 3202.37,2154 3353.72,2154 3735.9,1771.82 3735.9,1095 3720,1079.1 v1(3720,885) ; 3143.48,547.68 ccw(c3186.15,590.36) R19.2@3186.15,530 ; 3147.32,702.32 cw(c3190,659.64) v1@3190,720 ; 3155.55,535.61 cw(c3129.94,510) R19.2@3166.15,510 ; 3160.55,530.61 ccw(c3186.15,556.21) R19.2@3186.15,520 ; 3164.39,719.39 cw(c3190,693.79) v1@3190,730 ; 3171.46,726.46 ccw(c3162.93,735) v1@3175,735 ; R19.2@3186.15,505 3140,551.15 3140,695 3180,735 v1(3190,735) ; v1@3709.39,895.61 ccw(c3683.79,921.21) 3720,921.21 ccw(c3756.21,921.21) v1@3730.61,895.61
  Top Layer w16: P3.4@3144.78,255.22 ccw(c3108.03,291.97) 3160,291.97 ccw(c3211.97,291.97) P3.4@3175.22,255.22 ; P3.4@3160,240 3160,425 3186.15,451.15 R19.2@3186.15,505 ; R19.2@3174.13,487.98 cw(c3145.11,458.96) 3186.15,458.96 cw(c3227.2,458.96) R19.2@3198.17,487.98
  Bottom Layer w10: v1@3180.86,746.89 ccw(c3166.58,765.45) 3190,765.45 ; v1(3190,735) 3190,765.46 ; v1@3199.14,746.89 cw(c3213.42,765.45) 3190,765.45 ; v1@3709.39,874.39 ccw(c3683.79,848.79) 3683.79,885 ccw(c3683.79,921.21) v1@3709.39,895.61 ; v1(3720,885) 3608,885 3565,928 3352.54,928 3190,765.46
NetP3_5: P3.5 R59.2 U7.40 | length 2761.5
  Top Layer w10: U7.40@2914.13,1949.41 3028.46,1949.41 3053.05,1974 3279.16,1974 3477,1776.16 3477,1077.46 3501,1053.46 3501,826.46 3449.54,775 3285,775 3240,730 3240,547.31 ; 3251.7,535.61 cw(c3226.09,510) R59.2@3262.31,510 ; 3256.91,530.39 ccw(c3282.01,555.49) R59.2@3282.24,520 ; R59.2@3282.18,530 cw(c3281.79,589.09) 3240,547.31 ; R59.2@3282.31,505 3240,547.31
  Top Layer w16: P3.5@3260,140 3210,190 3210,355 3285,430 3285,502.31 R59.2@3282.31,505 R59.2@3282.31,487.31 ; R59.2@3270.29,487.98 cw(c3234.77,452.46) 3285,452.46 ; 3285,465.46 cw(c3316.85,465.46) R59.2@3294.33,487.98
NetP3_6: P3.6 R61.2 U7.56 | length 4027.2
  Top Layer w10: U7.56@2754.69,2207.28 2754.69,2371.81 2791.88,2409 2972.82,2409 3209.82,2172 3361.18,2172 3753.9,1779.28 3753.9,866.1 v1(3765,855) ; v1@3295,710 cw(c3295,673.79) 3320.61,699.39 cw(c3346.21,725) v1@3310,725 ; v1(3295,725) 3330,690 3330,553.46 R61.2@3378.46,505 ; 3335.78,547.68 ccw(c3378.46,590.36) R61.2@3378.46,530 ; 3347.85,535.61 cw(c3322.25,510) R61.2@3358.46,510 ; 3352.85,530.61 ccw(c3378.46,556.21) R61.2@3378.46,520
  Top Layer w16: P3.6@3244.78,255.22 ccw(c3208.03,291.97) 3260,291.97 ccw(c3311.97,291.97) P3.6@3275.22,255.22 ; P3.6@3260,240 3260,340 3378.46,458.46 R61.2@3378.46,505 ; R61.2@3366.44,487.98 cw(c3337.42,458.96) 3378.46,458.96 cw(c3419.5,458.96) R61.2@3390.48,487.98
  Bottom Layer w10: v1@3284.39,735.61 ccw(c3258.79,761.21) 3295,761.21 ccw(c3331.21,761.21) v1@3305.61,735.61 ; v1(3295,725) 3295,845 3360,910 3545,910 3635,820 3730,820 v1(3765,855) ; v1@3750,855 cw(c3713.79,855) 3739.39,829.39 cw(c3765,803.79) v1@3765,840
NetP3_7: P3.7 R38.2 U7.41 | length 2643.2
  Top Layer w10: U7.41@2914.13,1969.09 3022.69,1969.09 3045.59,1992 3286.62,1992 3495,1783.62 3495,1084.91 3519,1060.91 3519,819 3430,730 3430,549.62 R38.2@3474.62,505 ; 3431.94,547.68 ccw(c3474.62,590.36) R38.2@3474.62,530 ; 3444.01,535.61 cw(c3418.4,510) R38.2@3454.62,510 ; 3449.01,530.61 ccw(c3474.62,556.21) R38.2@3474.62,520
  Top Layer w16: P3.7@3360,140 3310,190 3310,340.38 R38.2@3474.62,505 ; 3437.06,467.44 cw(c3474.62,429.89) R38.2@3474.62,483 ; 3449.13,479.51 ccw(c3428.64,500) R38.2@3457.62,500
NetP3_8: P3.8 R65.2 U7.38 | length 2995
  Top Layer w10: U7.38@2914.13,1910.04 3040,1910.04 3067.96,1938 3262.84,1938 3290.8,1910.04
  Top Layer w12: 3290.8,1910.04 3440,1760.84 3440,860 v1(3450,850) ; 3440,878.97 ccw(c3478.97,878.97) v1@3451.41,851.41 ; 3440,907.94 ccw(c3507.94,907.94) v1@3459.9,859.9 ; 3525,714.99 cw(c3610.01,714.99) v1@3549.9,775.1 ; 3525,743.96 cw(c3581.04,743.96) v1@3541.41,783.59 ; v1@3527.01,779.79 cw(c3518.59,776.41) 3525,770 ; 3529.8,545.97 ccw(c3570.77,586.94) R65.2@3570.77,529 ; v1@3534.79,772.01 ccw(c3531.41,763.59) 3525,770 ; v1(3540,785) 3525,770 ; 3541.87,533.9 cw(c3517.97,510) R65.2@3551.77,510 ; R65.2@3550.28,525.49 ccw(c3570.77,545.97) R65.2@3570.77,517 ; R65.2@3570.77,505 3525,550.77 3525,770
  Top Layer w16: P3.8@3344.78,255.22 ccw(c3308.03,291.97) 3360,291.97 ccw(c3411.97,291.97) P3.8@3375.22,255.22 ; P3.8@3360,240 3360,294.23 R65.2@3570.77,505 ; 3533.21,467.44 cw(c3570.77,429.89) R65.2@3570.77,483 ; 3545.28,479.51 ccw(c3524.8,500) R65.2@3553.77,500
  Bottom Layer w12: v1@3450,836 cw(c3450,802.2) 3473.9,826.1 cw(c3497.8,850) v1@3464,850 ; v1(3450,850) 3515,785 ; 3473.42,826.58 ccw(c3540,893.15) v1@3540,799 ; 3493.91,806.09 ccw(c3540,852.18) v1@3540,787 ; 3514.39,785.61 ccw(c3540,811.21) v1@3540,775 ; v1@3528.06,777.69 ccw(c3515,769.68) 3515,785 ; v1@3528.06,792.31 cw(c3515,800.32) 3515,785 ; v1(3540,785) 3515,785
NetP3_9: P3.9 R37.2 U7.42 | length 2666.2
  Top Layer w10: U7.42@2914.13,1988.78 3016.92,1988.78 3038.14,2010 3294.07,2010 3513,1791.07 3513,1092.37 3540,1065.37 3540,835 3620,755 3620,551.92 R37.2@3666.92,505 ; 3624.25,547.68 ccw(c3666.92,590.36) R37.2@3666.92,530 ; 3636.32,535.61 cw(c3610.71,510) R37.2@3646.92,510 ; 3641.32,530.61 ccw(c3666.92,556.21) R37.2@3666.92,520
  Top Layer w16: P3.9@3460,140 3410,190 3410,285 3543.08,418.08 3580,418.08 R37.2@3666.92,505
NetP3_11: P3.11 R36.2 U7.43 | length 2720.9
  Top Layer w10: U7.43@2914.13,2008.46 3011.15,2008.46 3030.68,2028 3301.53,2028 3531,1798.53 3531,1099.82 3558,1072.82 3558,842.46 3720,680.46 3720,548.08 R36.2@3763.08,505 ; 3720.4,547.68 ccw(c3763.08,590.36) R36.2@3763.08,530 ; 3732.47,535.61 cw(c3706.86,510) R36.2@3743.08,510 ; 3737.47,530.61 ccw(c3763.08,556.21) R36.2@3763.08,520
  Top Layer w16: P3.11@3560,140 3510,190 3510,280 3641.92,411.92 3670,411.92 R36.2@3763.08,505
NetP3_13: P3.13 R34.2 U7.44 | length 2822
  Top Layer w10: U7.44@2914.13,2028.15 3005.38,2028.15 3023.23,2046 3308.99,2046 3549,1805.99 3549,1107.28 3576,1080.28 3576,849.91 3710.24,715.67 3789.33,715.67 3810,695 3810,554.23 R34.2@3859.23,505 ; 3816.55,547.68 ccw(c3859.23,590.36) R34.2@3859.23,530 ; 3828.62,535.61 cw(c3803.02,510) R34.2@3839.23,510 ; 3833.62,530.61 ccw(c3859.23,556.21) R34.2@3859.23,520
  Top Layer w16: P3.13@3660,140 3610,190 3610,275 3745.77,410.77 3765,410.77 R34.2@3859.23,505
NetP3_15: P3.15 R28.2 U7.45 | length 2917.5
  Top Layer w10: U7.45@2914.13,2047.83 2915.3,2049 3000.77,2049 3015.77,2064 3316.44,2064 3567,1813.44 3567,1114.73 3594,1087.73 3594,857.37 3717.7,733.67 3846.46,733.67 3910,670.13 3910,550.38 R28.2@3955.38,505 ; 3912.71,547.68 ccw(c3955.38,590.36) R28.2@3955.38,530 ; 3924.78,535.61 cw(c3899.17,510) R28.2@3935.38,510 ; 3929.78,530.61 ccw(c3955.38,556.21) R28.2@3955.38,520
  Top Layer w16: P3.15@3760,140 3710,190 3710,290 3830,410 3860.38,410 R28.2@3955.38,505
NetP3_17: P3.17 R26.2 U7.46 | length 3075.4
  Top Layer w10: U7.46@2914.13,2067.52 2993.83,2067.52 3008.31,2082 3323.9,2082 3590,1815.9 3590,1117.19 3612,1095.19 3612,864.82 3725.15,751.67 3925,751.67 3988.38,688.28 3988.38,646.62 4000,635 4000,556.54 R26.2@4051.54,505 ; 4008.86,547.68 ccw(c4051.54,590.36) R26.2@4051.54,530 ; 4020.93,535.61 cw(c3995.32,510) R26.2@4031.54,510 ; 4025.93,530.61 ccw(c4051.54,556.21) R26.2@4051.54,520
  Top Layer w16: P3.17@3860,140 3810,190 3810,280 3940,410 3956.54,410 R26.2@4051.54,505 ; 4013.98,467.44 cw(c4051.54,429.89) R26.2@4051.54,483 ; 4026.05,479.51 ccw(c4005.57,500) R26.2@4034.54,500
NetP3_18: P3.18 R66.2 U7.57 | length 3712.3
  Top Layer w10: U7.57@2735,2207.28 2735,2377.58 2784.42,2427 2980.28,2427 3217.28,2190 3368.63,2190 3772,1786.63 3772,907.54 3816.54,863 4003.67,863 4100,766.67 4100,552.69 R66.2@4147.69,505 ; 4105.01,547.68 ccw(c4147.69,590.36) R66.2@4147.69,530 ; 4117.09,535.61 cw(c4091.48,510) R66.2@4127.69,510 ; 4122.09,530.61 ccw(c4147.69,556.21) R66.2@4147.69,520
  Top Layer w16: P3.18@3845.21,255.64 ccw(c3812.71,290) 3860,290 ; P3.18@3860,240 3860,290 ; P3.18@3874.79,255.64 cw(c3907.29,290) 3860,290 ; 4110.14,467.44 cw(c4147.69,429.89) R66.2@4147.69,483 ; 4122.21,479.51 ccw(c4101.72,500) R66.2@4130.69,500 ; R66.2@4147.69,505 4012.69,370 3940,370 3860,290
NetP3_19: P3.19 R25.2 U7.58 | length 3726.2
  Top Layer w10: U7.58@2715.31,2207.28 2715.31,2383.35 2776.96,2445 2987.73,2445 3224.73,2208 3376.09,2208 3790,1794.09 3790,915 3824,881 4011.12,881 4200,692.12 4200,548.85 R25.2@4243.85,505
  Top Layer w16: P3.19@3960,140 3910,190 3910,290 3950,330 4068.85,330 R25.2@4243.85,505
NetP3_20: P3.20 R67.2 U7.5 | length 4379.2
  Top Layer w10: v1(1985,1570) 1987,1572 2189,1572 2190,1573 2245.18,1573 2308.63,1509.54 2409.09,1509.54 2457.72,1558.18 2457.72,1611.11 U7.5@2459.41,1612.8 ; 2457.72,1577.01 cw(c2465.66,1577.01) U7.5@2460.05,1582.63
  Top Layer w16: P3.20@3960,240 4020,300 4095,300 4215,420 v1(4285,420) 4340,475 R67.2@4340,505
  Bottom Layer w10: v1@1970,1570 cw(c1933.79,1570) 1959.39,1544.39 cw(c1985,1518.79) v1@1985,1555 ; v1(1985,1570) 1955,1540 1955,960 2180,735 2930,735 3070,595 4110,595 v1(4285,420) ; v1@4270,420 ccw(c4233.79,420) 4259.39,445.61 ccw(c4285,471.21) v1@4285,435
NetP3_29: P3.29 U7.23 | length 3240.1
  Top Layer w10: U7.23@2813.74,1612.8 2813.74,1565.8 2837.54,1542 2902,1542 2955,1595 3367.54,1595 3403,1559.54 3403,903 v1(3335,835) ; v1(4445,400) 4410,365 4410,190 P3.29@4460,140
  Bottom Layer w10: v1@3335,820 cw(c3335,783.79) 3360.61,809.39 cw(c3386.21,835) v1@3350,835 ; v1(3335,835) 3446,724 4301,724 4355,670 4355,490 v1(4445,400) ; v1@4430,400 ccw(c4393.79,400) 4419.39,425.61 ccw(c4445,451.21) v1@4445,415
NetP3_30: P3.30 U7.24 | length 3164.5
  Top Layer w10: U7.24@2833.43,1612.8 2833.43,1571.57 2845,1560 2890,1560 2948,1618 3370,1618 3421,1567 3421,871 v1(3385,835) ; v1@3385,850 ccw(c3385,886.21) 3410.61,860.61 ccw(c3436.21,835) v1@3400,835 ; P3.30@4460,240 4460,350 v1(4510,400)
  Bottom Layer w10: v1@3385,820 cw(c3385,783.79) 3410.61,809.39 cw(c3436.21,835) v1@3400,835 ; v1(3385,835) 3478,742 4308.46,742 4390,660.46 4390,520 v1(4510,400) ; v1@4495,400 ccw(c4458.79,400) 4484.39,425.61 ccw(c4510,451.21) v1@4510,415
NetP7_3: P7.3 U7.77 | length 2228.6
  Top Layer w10: U7.77@2319.65,2126.57 2278.43,2126.57 2265,2140 2265,2170 2315,2220 2315,2445 2280,2480 2280,2625 2480,2825 2480,2960 2570,3050 2570,3410 v1(2450,3530)
  Bottom Layer w10: v1@2439.39,3540.61 ccw(c2413.79,3566.21) 2450,3566.21 ccw(c2486.21,3566.21) v1@2460.61,3540.61 ; v1(2450,3530) 2450,3590 2495,3635 2710,3635 2760,3685 ; P7.3@2746.03,3709.46 cw(c2731.6,3685) 2760,3685 ; P7.3@2760,3733.15 2760,3685 ; P7.3@2773.97,3709.46 ccw(c2788.4,3685) 2760,3685
NetP7_5: P7.5 U7.47 | length 2218
  Top Layer w10: v1@2799.39,2575.61 ccw(c2773.79,2601.21) 2810,2601.21 ccw(c2846.21,2601.21) v1@2820.61,2575.61 ; v1(2810,2565) 2810,3560.46 2860,3610.46 P7.5@2860,3733.15 ; P7.5@2840.55,3713.7 cw(c2793.61,3666.76) 2860,3666.76 cw(c2926.39,3666.76) P7.5@2879.45,3713.7 ; P7.5@2847.63,3720.78 cw(c2817.75,3690.9) 2860,3690.9 cw(c2902.25,3690.9) P7.5@2872.37,3720.78 ; U7.47@2914.13,2087.2 2982.2,2087.2 3025,2130 v1(3025,2165)
  Bottom Layer w10: v1(2810,2565) 2870,2565 3025,2410 v1(3025,2165) ; v1@2820.61,2554.39 cw(c2846.21,2528.79) 2846.21,2565 cw(c2846.21,2601.21) v1@2820.61,2575.61 ; v1@3014.39,2175.61 ccw(c2988.79,2201.21) 3025,2201.21 ccw(c3061.21,2201.21) v1@3035.61,2175.61
NetP7_6: P7.6 U7.48 | length 2172.5
  Top Layer w10: v1(2750,2565) 2750,2610 2783,2643 2783,3563 2810,3590 2810,3783.15 P7.6@2860,3833.15 ; U7.48@2914.13,2106.89 2966.89,2106.89 2990,2130 v1(2990,2210)
  Bottom Layer w10: v1@2745.01,2565.37 ccw(c2776.3,2563.06) 2754.12,2540.88 ; v1(2750,2565) 2750,2545 2785,2510 ; v1@2754.99,2564.63 ccw(c2805.06,2560.95) 2769.56,2525.44 ; v1@2764.96,2563.9 ccw(c2833.82,2558.83) 2785,2510 ; v1@2979.39,2220.61 ccw(c2953.79,2246.21) 2990,2246.21 ccw(c3026.21,2246.21) v1@3000.61,2220.61 ; v1(2990,2210) 2990,2395 2875,2510 2785,2510
NetP7_7: P7.7 U7.25 | length 3257.2
  Top Layer w10: U7.25@2853.11,1612.8 2876.31,1636 3331,1636 ; v1(2880,2925) 2880,3565 2960,3645 P7.7@2960,3733.15 ; v1@3340.02,1659.3 cw(c3309.15,1657.85) 3331,1636 ; v1@3354.3,1645.02 ccw(c3352.85,1614.15) 3331,1636 ; v1(3355,1660) 3331,1636
  Bottom Layer w10: v1(2880,2925) 3124.56,2925 3505,2544.56 3505,1810 v1(3355,1660) ; v1@2890.61,2914.39 cw(c2916.21,2888.79) 2916.21,2925 cw(c2916.21,2961.21) v1@2890.61,2935.61 ; v1@3355,1675 ccw(c3355,1711.21) 3380.61,1685.61 ccw(c3406.21,1660) v1@3370,1660
NetP7_8: P7.8 U7.26 | length 3369.3
  Top Layer w10: v1@2834.39,2885.61 ccw(c2808.79,2911.21) 2845,2911.21 ccw(c2881.21,2911.21) v1@2855.61,2885.61 ; v1(2845,2875) 2845,3555.46 2910,3620.46 2910,3783.15 P7.8@2960,3833.15 ; U7.26@2914.13,1673.82 2956.18,1673.82 2976,1654 3299,1654 v1(3361.67,1716.67) ; v1@3346.67,1716.67 cw(c3310.46,1716.67) 3336.06,1691.06 cw(c3361.67,1665.46) v1@3361.67,1701.67
  Bottom Layer w10: v1(2845,2875) 3149.1,2875 3487,2537.1 3487,1842 v1(3361.67,1716.67) ; v1@2855.61,2864.39 cw(c2881.21,2838.79) 2881.21,2875 cw(c2881.21,2911.21) v1@2855.61,2885.61 ; v1@3361.67,1731.67 ccw(c3361.67,1767.88) 3387.28,1742.28 ccw(c3412.88,1716.67) v1@3376.67,1716.67
NetP7_9: P7.9 U7.68 | length 2178.2
  Top Layer w10: U7.68@2518.46,2207.28 2518.46,2296.54 2483,2332 2483,2418 2610,2545 2610,3485 v1(2545,3550) ; v1@2545,3535 cw(c2545,3498.79) 2570.61,3524.39 cw(c2596.21,3550) v1@2560,3550
  Bottom Layer w10: v1(2545,3550) 2910,3550 3060,3700 ; v1@2555.61,3539.39 cw(c2581.21,3513.79) 2581.21,3550 cw(c2581.21,3586.21) v1@2555.61,3560.61 ; P7.9@3054.92,3706.12 cw(c3053.77,3700) 3060,3700 ; P7.9@3060,3733.15 3060,3700 ; P7.9@3065.08,3706.12 ccw(c3066.23,3700) 3060,3700
NetP7_10: P7.10 U7.69 | length 2527.8
  Top Layer w10: v1(2490,3560) 2490,3545 2592,3443 2592,2557 2464.54,2429.54 2464.54,2325 2498.78,2290.76 U7.69@2498.78,2207.28 ; v1@2495,3560 ccw(c2543.28,3560) 2509.14,3525.86 ; v1@2505,3560 ccw(c2577.43,3560) 2526.21,3508.79
  Bottom Layer w10: v1(2490,3560) 2530,3600 2930,3600 3010,3680 3010,3783.15 P7.10@3060,3833.15 ; v1@2490,3575 ccw(c2490,3611.21) 2515.61,3585.61 ccw(c2541.21,3560) v1@2505,3560 ; P7.10@3032.5,3833.15 cw(c2966.11,3833.15) 3013.05,3786.2 cw(c3060,3739.26) P7.10@3060,3805.65 ; P7.10@3042.5,3833.15 cw(c3000.25,3833.15) 3030.13,3803.28 cw(c3060,3773.4) P7.10@3060,3815.65
NetP8_1: P8.1 P8.2 P8.3 P8.4 P8.5 P8.6 P8.7 P8.8 P8.9
NetP9_1: P9.1 P9.2 P9.3 P9.4 P9.5 P9.6 P9.7 P9.8 P9.9
NetP10_1: P10.1 P10.2 P10.3 P10.4 P10.5 P10.6 P10.7 P10.8 P10.9
NetP11_1: P11.1 P11.2 P11.3 P11.4 P11.5 P11.6 P11.7 P11.8 P11.9
NetP18_1: P18.1 U7.81 | length 3377.9
  Top Layer w10: U7.81@2319.65,2047.83 2255.34,2047.83 2189,2114.18 2189,2985.81 2333.19,3130 v1(2440,3130)
  Bottom Layer w10: v1(2440,3130) 2528.63,3130 2712.63,3314 3042.18,3314 3095.18,3367 3246.09,3367 3469.09,3590 3856.85,3590 P18.1@4000,3733.15 ; v1@2450.61,3119.39 cw(c2476.21,3093.79) 2476.21,3130 cw(c2476.21,3166.21) v1@2450.61,3140.61 ; P18.1@3972.5,3733.15 cw(c3906.11,3733.15) 3953.05,3686.2 cw(c4000,3639.26) P18.1@4000,3705.65 ; P18.1@3982.5,3733.15 cw(c3940.25,3733.15) 3970.13,3703.28 cw(c4000,3673.4) P18.1@4000,3715.65
NetP18_2: P18.2 U7.82 | length 3560.2
  Top Layer w10: U7.82@2319.65,2028.15 2249.57,2028.15 2171,2106.72 2171,2993.27 2342.73,3165 v1(2485,3165) ; v1@2474.39,3154.39 ccw(c2448.79,3128.79) 2448.79,3165 ccw(c2448.79,3201.21) v1@2474.39,3175.61
  Bottom Layer w10: v1(2485,3165) 2538.18,3165 2705.18,3332 3034.72,3332 3087.72,3385 3238.63,3385 3461.63,3608 3828,3608 3935,3715 3935,3768.15 P18.2@4000,3833.15 ; v1@2495.61,3154.39 cw(c2521.21,3128.79) 2521.21,3165 cw(c2521.21,3201.21) v1@2495.61,3175.61 ; P18.2@3972.5,3833.15 cw(c3906.11,3833.15) 3953.05,3786.2 cw(c4000,3739.26) P18.2@4000,3805.65 ; P18.2@3982.5,3833.15 cw(c3940.25,3833.15) 3970.13,3803.28 cw(c4000,3773.4) P18.2@4000,3815.65
NetP18_3: P18.3 U7.83 | length 3844.1
  Top Layer w10: U7.83@2319.65,2008.46 2243.8,2008.46 2153,2099.27 2153,3000.72 2352.28,3200 v1(2440,3200) ; v1@2429.39,3189.39 ccw(c2403.79,3163.79) 2403.79,3200 ccw(c2403.79,3236.21) v1@2429.39,3210.61
  Bottom Layer w10: v1(2440,3200) 2547.72,3200 2697.72,3350 3027.27,3350 3080.27,3403 3231.18,3403 3454.18,3626 3806,3626 3915,3735 3915,3812.5 3981.15,3878.65 4018.85,3878.65 4050,3847.5 4050,3783.15 P18.3@4100,3733.15 ; v1@2450.61,3189.39 cw(c2476.21,3163.79) 2476.21,3200 cw(c2476.21,3236.21) v1@2450.61,3210.61 ; P18.3@4072.5,3733.15 ccw(c4006.11,3733.15) 4053.05,3780.1 ccw(c4100,3827.04) P18.3@4100,3760.65 ; P18.3@4082.5,3733.15 ccw(c4040.25,3733.15) 4070.13,3763.02 ccw(c4100,3792.9) P18.3@4100,3750.65
NetP18_4: P18.4 U7.84 | length 3621.1
  Top Layer w10: U7.84@2319.65,1988.78 2238.03,1988.78 2135,2091.81 2135,3008.18 2361.82,3235 v1(2480,3235) ; v1@2469.39,3224.39 ccw(c2443.79,3198.79) 2443.79,3235 ccw(c2443.79,3271.21) v1@2469.39,3245.61 ; v1(3822.65,3787.65) 4054.5,3787.65 P18.4@4100,3833.15
  Bottom Layer w10: v1(2480,3235) 2557.27,3235 2690.27,3368 3019.81,3368 3072.81,3421 3223.72,3421 3446.72,3644 3679,3644 v1(3822.65,3787.65) ; v1@2490.61,3224.39 cw(c2516.21,3198.79) 2516.21,3235 cw(c2516.21,3271.21) v1@2490.61,3245.61 ; v1@3807.65,3787.65 cw(c3771.44,3787.65) 3797.04,3762.04 cw(c3822.65,3736.44) v1@3822.65,3772.65
NetP18_5: P18.5 U7.85 | length 3799.9
  Top Layer w10: U7.85@2319.65,1969.09 2232.26,1969.09 2117,2084.35 2117,3015.63 2371.37,3270 v1(2440,3270) ; v1@2429.39,3259.39 ccw(c2403.79,3233.79) 2403.79,3270 ccw(c2403.79,3306.21) v1@2429.39,3280.61 ; v1(3690,3730) 3754.96,3665.04 4155.04,3665.04 4200,3710 P18.5@4200,3733.15
  Bottom Layer w10: v1(2440,3270) 2566.81,3270 2682.81,3386 3012.35,3386 3065.35,3439 3216.27,3439 3439.27,3662 3622,3662 v1(3690,3730) ; v1@2450.61,3259.39 cw(c2476.21,3233.79) 2476.21,3270 cw(c2476.21,3306.21) v1@2450.61,3280.61 ; v1@3675,3730 cw(c3638.79,3730) 3664.39,3704.39 cw(c3690,3678.79) v1@3690,3715
NetP18_6: P18.6 U7.86 | length 3856.1
  Top Layer w10: U7.86@2319.65,1949.41 2226.49,1949.41 2099,2076.9 2099,3023.09 2380.91,3305 v3@2460,3305 ; v3@2464.39,3294.39 ccw(c2438.79,3268.79) 2438.79,3305 ccw(c2438.79,3341.21) v3@2464.39,3315.61 ; v1(3740,3770) 3856.57,3886.57 4146.57,3886.57 P18.6@4200,3833.15
  Bottom Layer w10: v3(2475,3305) 2576.35,3305 2675.35,3404 3004.9,3404 3057.9,3457 3208.81,3457 3431.81,3680 3575,3680 3665,3770 v1(3740,3770) ; v3@2485.61,3294.39 cw(c2511.21,3268.79) 2511.21,3305 cw(c2511.21,3341.21) v3@2485.61,3315.61 ; v1@3729.39,3759.39 ccw(c3703.79,3733.79) 3703.79,3770 ccw(c3703.79,3806.21) v1@3729.39,3780.61